# EAGLE board kossel_mini_extruder (EAGLE 6.4)
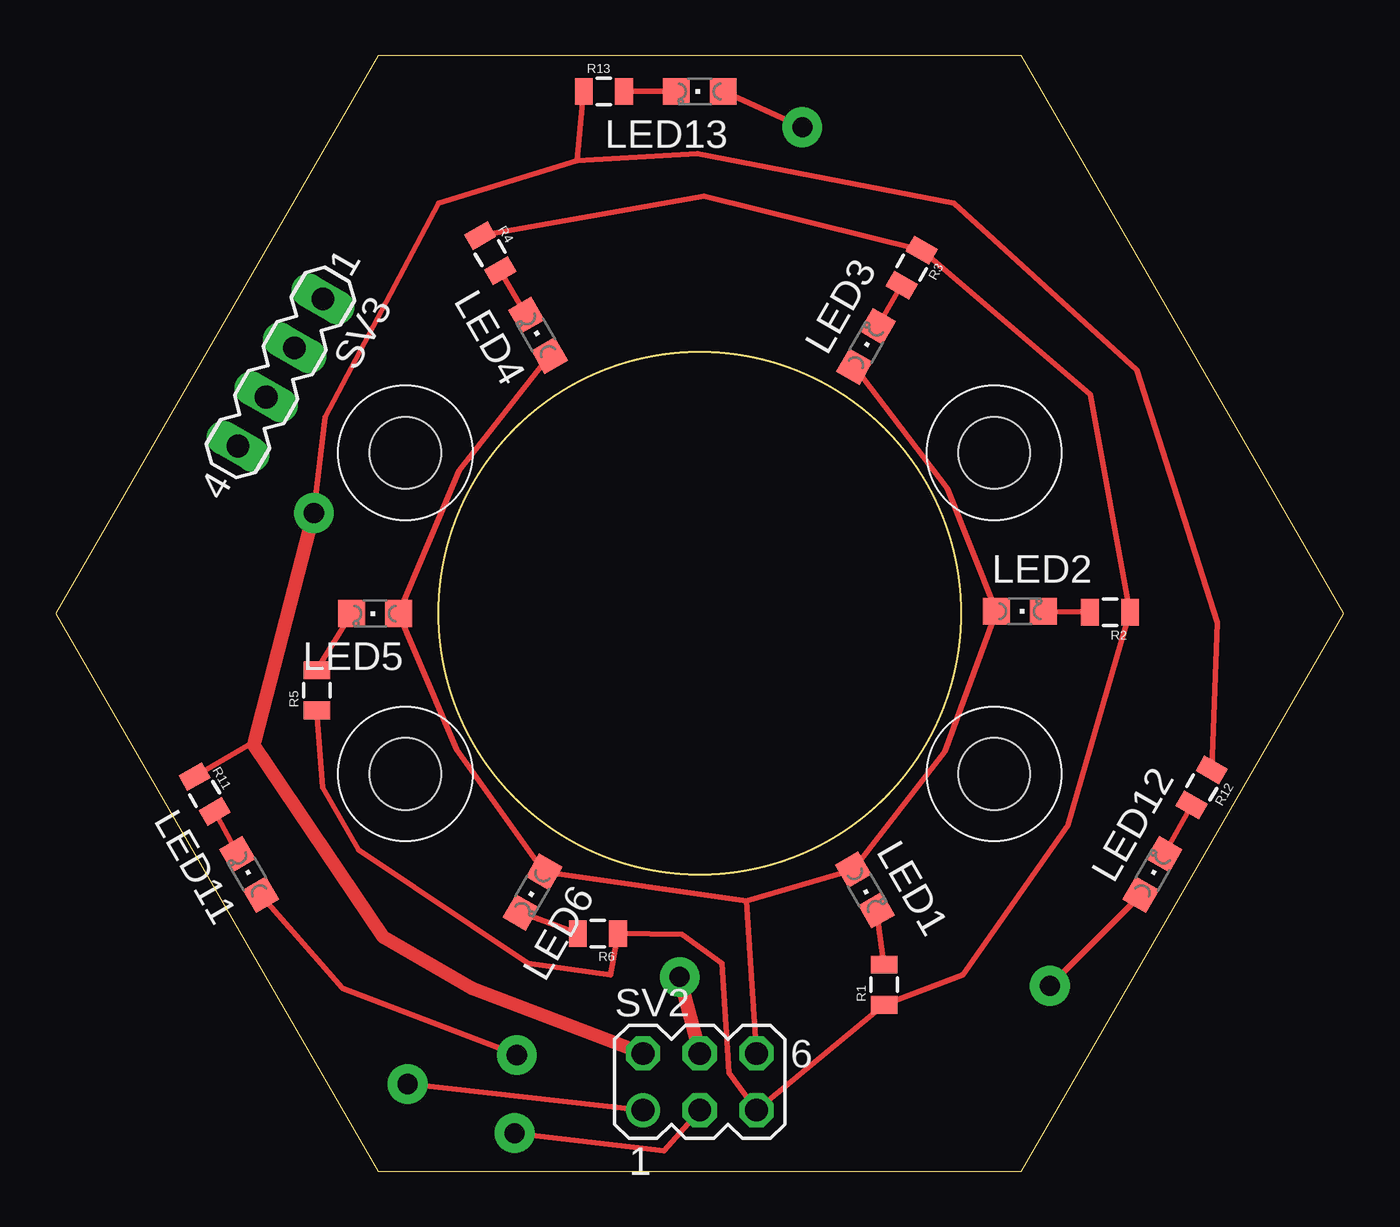
[diagram p0: board, top side]
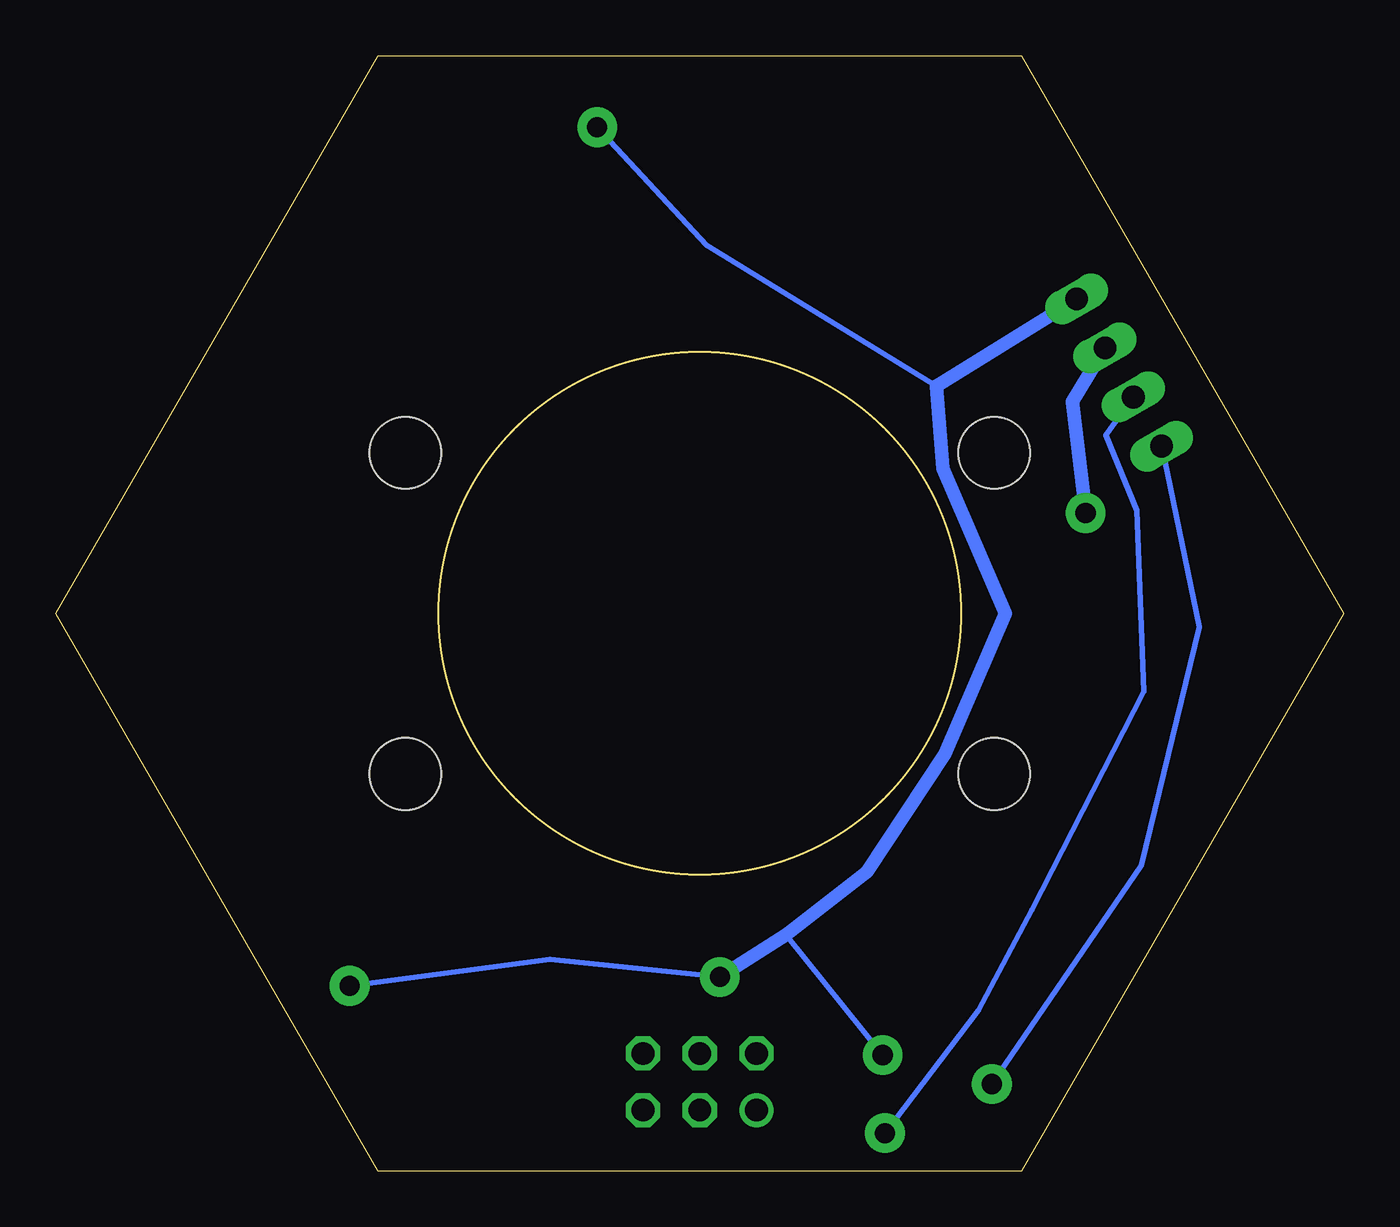
[diagram p1: board, bottom side, seen from below]

Size 57.74 x 50 mm. Coordinates in mm from the lower left corner, seen from the top.
Outline: 57.74,25 43.3,50 14.44,50 0,25 14.44,0 43.3,0 57.74,25
Outline: circle at 28.87,25 radius 11.7
Copper layers (1*2*15*16): Top 0.035mm / dielectric 0.2mm / layer 2 0.0175mm / dielectric 1.1mm / layer 15 0.0175mm / dielectric 0.2mm / Bottom 0.035mm
Design rules "SeeedStudio_DRU_no_angle_20130527 *": minimum track width 6mil, minimum drill 12mil, track to track 10mil, track to pad 10mil, pad to pad 10mil, via to via 10mil, smd to smd 0mil, copper to edge 10mil, drill to drill 10mil, minimum pad ring 6mil, minimum via ring 6mil, stop-mask expansion 2mil, vias tented up to drill 25mil, thermal gap 10mil
Net classes: 0 default: width 0.203 mm, drill 0.305 mm, clearance 0.203 mm; 1 high current: width 0.762 mm, drill 0.457 mm, clearance 0.203 mm
Holes 3.2 mm at 42.07,32.2 42.07,17.8 15.67,32.2 15.67,17.8

## Footprints (pad centres in the part's own frame; a part is rotated, then mirrored left to right if it is on the bottom)
CHIPLED_0805 = smd 1.2 x 1.2: A -1.05,0; C 1.05,0
0805 = smd 0.8 x 1.2: 1 -0.9,0; 2 0.9,0
MA03-2 = drill 1.016: 1 -2.54,-1.27 | drill 1.016 octagon: 2 -2.54,1.27; 3 0,-1.27; 4 0,1.27; 5 2.54,-1.27; 6 2.54,1.27
MA04-1 = drill 1.016 long: 1 -3.81,0; 2 -1.27,0; 3 1.27,0; 4 3.81,0

## Placement (x,y rotation side)
LED1  [CHIPLED_0805]  36.27,12.6 300 top
LED2  [CHIPLED_0805]  43.22,25.09 0 top
LED3  [CHIPLED_0805]  36.32,36.97 60 top
LED4  [CHIPLED_0805]  21.62,37.47 120 top
LED5  [CHIPLED_0805]  14.32,24.99 180 top
LED6  [CHIPLED_0805]  21.37,12.5 240 top
LED11  [CHIPLED_0805]  8.67,13.3 120 top
LED12  [CHIPLED_0805]  49.17,13.3 60 top
LED13  [CHIPLED_0805]  28.87,48.4 180 top
R1  [0805]  37.14,8.35 90 top
R2  [0805]  47.26,25.05 180 top
R3  [0805]  38.37,40.5 240 top
R4  [0805]  19.48,41.15 300 top
R5  [0805]  11.7,21.55 90 top
R6  [0805]  24.3,10.65 180 top
R11  [0805]  6.67,16.9 300 top
R12  [0805]  51.37,17.2 240 top
R13  [0805]  24.57,48.4 0 top
SV2  [MA03-2]  28.87,4 0 top
SV3  [MA04-1]  10.07,35.8 240 top

## Library data of the parts
LED1-LED6 LED11-LED13 = SparkFun-LED
R1-R6 R11-R13 = SparkFun-Passives
SV2 SV3 = con-lstb; OC_FARNELL: unknown; OC_NEWARK: unknown

## Nets
GND: R1.1 R2.1 R3.1 R4.1 R5.1 R6.1 SV2.5
HOT_12V: R11.1 R12.1 R13.1 SV2.2 SV3.2
HOT_SIG: LED11.A LED12.A LED13.A SV2.4 SV3.1
N$1: LED1.C R1.2
N$2: LED2.C R2.2
N$3: LED3.C R3.2
N$4: LED4.C R4.2
N$5: LED5.C R5.2
N$6: LED6.C R6.2
N$16: LED11.C R11.2
N$17: LED12.C R12.2
N$18: LED13.C R13.2
THERM_GND: SV2.1 SV3.4
THERM_SIG: SV2.3 SV3.3
VCC: LED1.A LED2.A LED3.A LED4.A LED5.A LED6.A SV2.6

## Tracks (layer width: path | path; a pad name or v marks a point on that pad's centre or on a via)
GND
  Top 0.254: R4.1 29.07,43.7 R3.1 46.37,34.8 R2.1 45.37,15.5 40.67,8.8 R1.1 SV2.5 30.17,4.4 29.87,9.3 28.07,10.6 R6.1 24.87,8.8 21.17,9.3 13.57,14.4 11.97,17.2 R5.1
HOT_12V  (via drill 0.9 pad 1.78)
  Top 0.254: 23.37,45.3 17.17,43.4 12.07,33.8 v11.57,29.5 | 23.37,45.3 28.77,45.6 40.27,43.4 48.47,35.9 52.07,24.6 R12.1 | 23.37,45.3 R13.1 | R11.1 8.91,19.26
  Top 0.61: SV2.2 18.67,8.2 14.67,10.5 8.87,19.1 8.91,19.26 v11.57,29.5
  Bottom 0.61: v11.57,29.5 12.17,34.5 SV3.2
HOT_SIG  (via drill 0.9 pad 1.78)
  Top 0.254: v33.47,46.8 LED13.A | LED12.A v44.57,8.3 | LED11.A 12.87,8.2 v20.67,5.2
  Top 0.61: SV2.4 v27.97,8.7
  Bottom 0.254: 18.27,35.2 28.57,41.5 v33.47,46.8 | v44.57,8.3 35.57,9.5 v27.97,8.7 | v20.67,5.2 25,10.6
  Bottom 0.61: v27.97,8.7 25,10.6 21.37,13.4 17.87,18.7 15.17,25 17.97,31.5 18.27,35.2 SV3.1
N$1
  Top 0.254: R1.2 LED1.C
N$2
  Top 0.254: LED2.C R2.2
N$3
  Top 0.254: R3.2 LED3.C
N$4
  Top 0.254: LED4.C R4.2
N$5
  Top 0.254: LED5.C R5.2
N$6
  Top 0.254: R6.2 LED6.C
N$16
  Top 0.254: R11.2 LED11.C
N$17
  Top 0.254: R12.2 LED12.C
N$18
  Top 0.254: R13.2 LED13.C
THERM_GND  (via drill 0.9 pad 1.78)
  Top 0.254: v15.77,3.9 SV2.1
  Bottom 0.254: SV3.4 6.47,24.4 9.07,13.7 v15.77,3.9
THERM_SIG  (via drill 0.9 pad 1.78)
  Top 0.254: v20.57,1.7 27.27,0.9 SV2.3
  Bottom 0.254: SV3.3 10.67,33 9.27,29.6 8.97,21.5 13.97,11.7 16.37,7.2 v20.57,1.7
VCC
  Top 0.254: SV2.6 30.97,12.1 | 30.97,12.1 LED1.A 39.87,18.8 LED2.A 39.97,30.6 LED3.A | 30.97,12.1 LED6.A 17.97,18.9 LED5.A 18.07,31.4 LED4.A